# EAGLE board lat_stm_rpi (EAGLE 9.6.2)
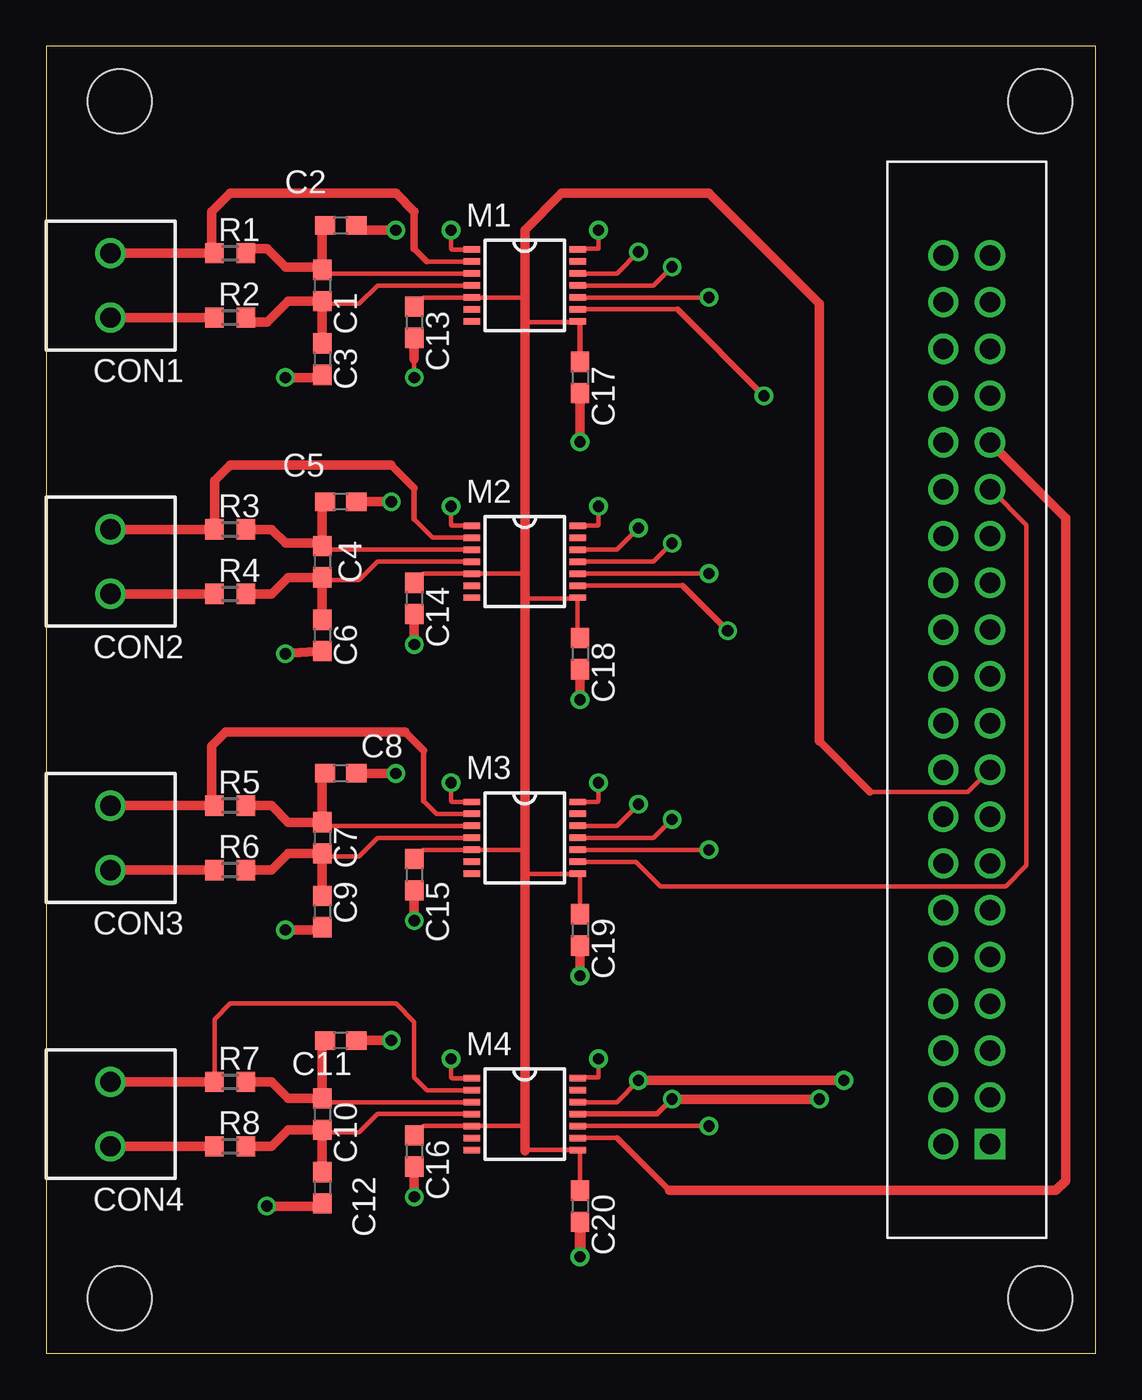
[diagram p0: board, top side]
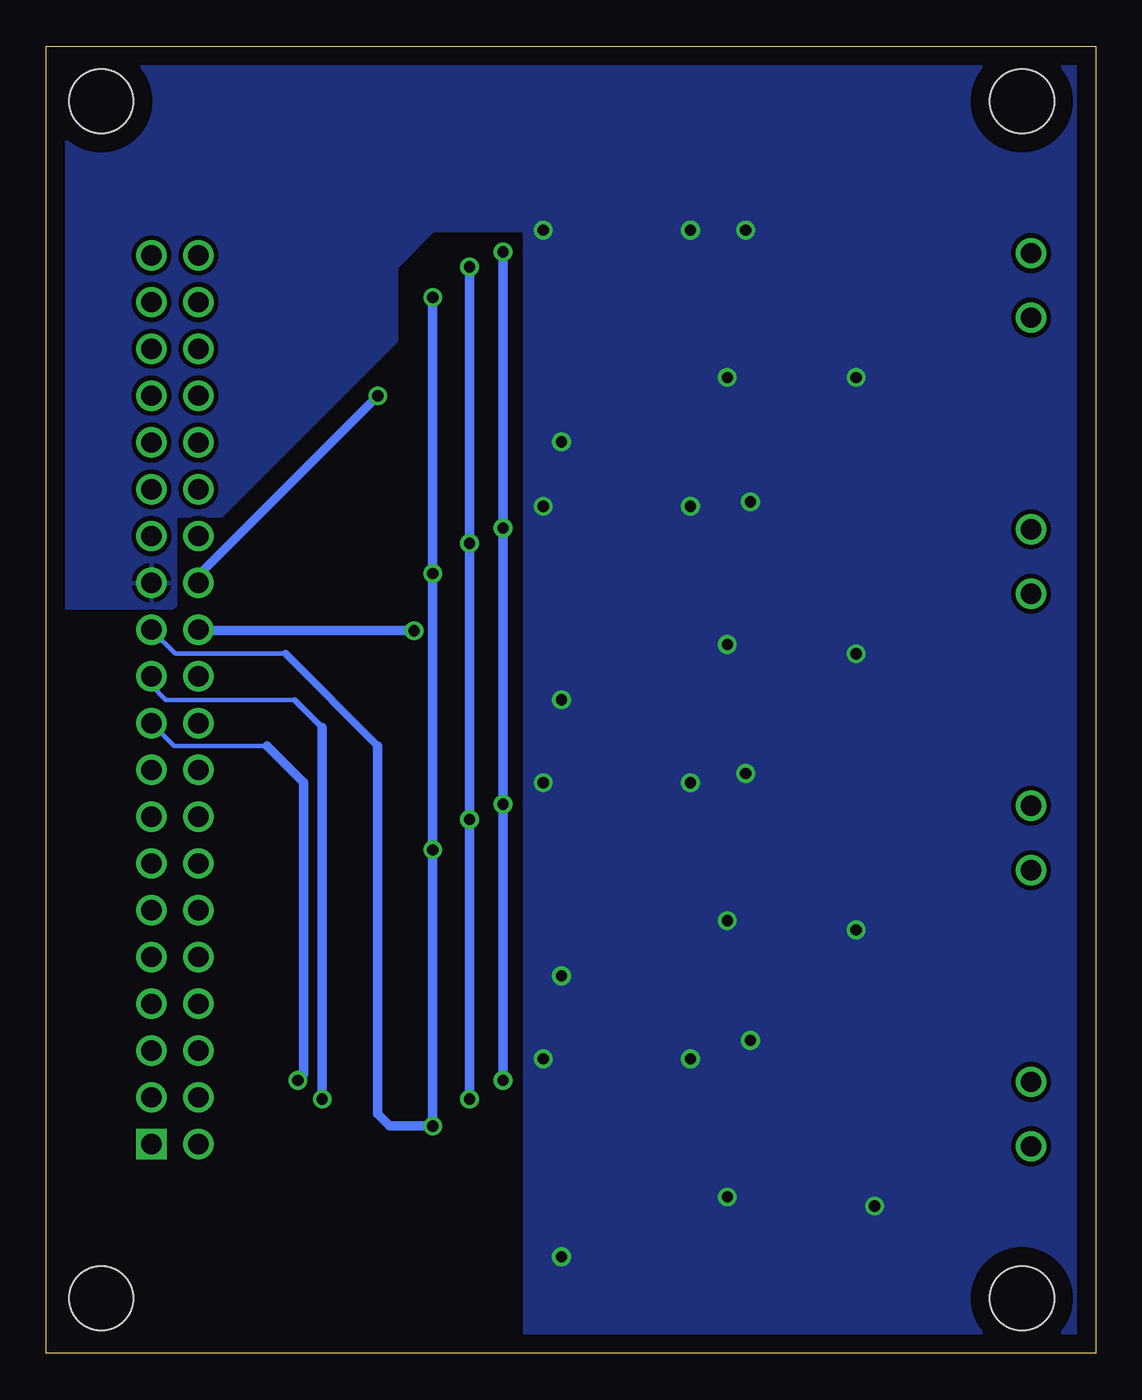
[diagram p1: board, bottom side, seen from below]

Size 57 x 71 mm. Coordinates in mm from the lower left corner, seen from the top.
Outline: 0,0 57,0 57,71 0,71 0,0
Copper layers (1*16): Top 0.035mm / dielectric 1.5mm / Bottom 0.035mm
Design rules "default": minimum track width 6mil, minimum drill 0.35mm, track to track 6mil, track to pad 6mil, pad to pad 6mil, via to via 6mil, smd to smd 6mil, copper to edge 40mil, drill to drill 6mil, minimum pad ring 10mil, minimum via ring 8mil, stop-mask expansion 4mil, vias tented up to drill 0mil, thermal gap 10mil
Net classes: 0 default: width 0.254 mm, drill 0.305 mm, clearance 0.254 mm; 1 spi_bus: width 0.254 mm, drill 0.305 mm, clearance 0.254 mm; 2 spi_cs: width 0.254 mm, drill 0.305 mm, clearance 0.254 mm; 3 tc: width 0.254 mm, drill 0.305 mm, clearance 0.254 mm; 4 3v3: width 0.508 mm, drill 0.61 mm, clearance 0.508 mm; 5 gnd: width 0.762 mm, drill 0.889 mm, clearance 0.254 mm; 6 dev: width 0.254 mm, drill 0.254 mm, clearance 0.254 mm
Holes 3.5 mm at 4,3 54,3 4,68 54,68

## Footprints (pad centres in the part's own frame; a part is rotated, then mirrored left to right if it is on the bottom)
C0603 = smd 1.1 x 1: 1 -0.85,0; 2 0.85,0
893-1332 = drill 1.1: P$1 0,1.75; P$2 0,-1.75
TSSOP14 = smd 0.9 x 0.35: 1 -2.875,1.95; 2 -2.875,1.3; 3 -2.875,0.65; 4 -2.875,0; 5 -2.875,-0.65; 6 -2.875,-1.3; 7 -2.875,-1.95; 8 2.875,-1.95; 9 2.875,-1.3; 10 2.875,-0.65; 11 2.875,0; 12 2.875,0.65; 13 2.875,1.3; 14 2.875,1.95
R0603 = smd 1 x 1.1: 1 -0.85,0; 2 0.85,0
RPI_CON = drill 1.1 square: RPI01 -1.27,24.13 | drill 1.1: RPI02 1.27,24.13; RPI03 -1.27,21.59; RPI04 1.27,21.59; RPI05 -1.27,19.05; RPI06 1.27,19.05; RPI07 -1.27,16.51; RPI08 1.27,16.51; RPI09 -1.27,13.97; RPI10 1.27,13.97; RPI11 -1.27,11.43; RPI12 1.27,11.43; RPI13 -1.27,8.89; RPI14 1.27,8.89; RPI15 -1.27,6.35; RPI16 1.27,6.35; RPI17 -1.27,3.81; RPI18 1.27,3.81; RPI19 -1.27,1.27; RPI20 1.27,1.27; RPI21 -1.27,-1.27; RPI22 1.27,-1.27; RPI23 -1.27,-3.81; RPI24 1.27,-3.81; RPI25 -1.27,-6.35; RPI26 1.27,-6.35; RPI27 -1.27,-8.89; RPI28 1.27,-8.89; RPI29 -1.27,-11.43; RPI30 1.27,-11.43; RPI31 -1.27,-13.97; RPI32 1.27,-13.97; RPI33 -1.27,-16.51; RPI34 1.27,-16.51; RPI35 -1.27,-19.05; RPI36 1.27,-19.05; RPI37 -1.27,-21.59; RPI38 1.27,-21.59; RPI39 -1.27,-24.13; RPI40 1.27,-24.13

## Placement (x,y rotation side)
C1  0.1u  [C0603]  15,58 270 top
C2  0.01u  [C0603]  16,61.25 180 top
C3  0.01u  [C0603]  15,54 270 top
C4  0.1u  [C0603]  15,43 270 top
C5  0.01u  [C0603]  16,46.25 180 top
C6  0.01u  [C0603]  15,39 270 top
C7  0.1u  [C0603]  15,28 270 top
C8  0.01u  [C0603]  16,31.5 180 top
C9  0.01u  [C0603]  15,24 270 top
C10  0.1u  [C0603]  15,13 270 top
C11  0.01u  [C0603]  16,17 180 top
C12  0.01u  [C0603]  15,9 270 top
C13  0.1u  [C0603]  20,56 270 top
C14  0.1u  [C0603]  20,41 270 top
C15  0.1u  [C0603]  20,26 270 top
C16  0.1u  [C0603]  20,11 270 top
C17  0.1u  [C0603]  29,53 270 top
C18  0.1u  [C0603]  29,38 270 top
C19  0.1u  [C0603]  29,23 270 top
C20  0.1u  [C0603]  29,8 270 top
CON1  893-1332  [893-1332]  3.5,58 180 top
CON2  893-1332  [893-1332]  3.5,43 180 top
CON3  893-1332  [893-1332]  3.5,28 180 top
CON4  893-1332  [893-1332]  3.5,13 180 top
M1  MAX31856  [TSSOP14]  26,58 0 top
M2  MAX31856  [TSSOP14]  26,43 0 top
M3  MAX31856  [TSSOP14]  26,28 0 top
M4  MAX31856  [TSSOP14]  26,13 0 top
R1  100  [R0603]  10,59.75 0 top
R2  100  [R0603]  10,56.25 0 top
R3  100  [R0603]  10,44.75 0 top
R4  100  [R0603]  10,41.25 0 top
R5  100  [R0603]  10,29.75 0 top
R6  100  [R0603]  10,26.25 0 top
R7  100  [R0603]  10,14.75 0 top
R8  100  [R0603]  10,11.25 0 top
RPC1  RPI_CON  [RPI_CON]  50,35.5 180 top

## Library data of the parts
C1-C20 = rcl; SPICEPREFIX: C
CON1-CON4 M1-M4 RPC1 = lib_test
R1-R8 = rcl; SPICEPREFIX: R

## Nets
3V3_SPI [dev]: C13.1 C14.1 C15.1 C16.1 C17.1 C18.1 C19.1 C20.1 M1.5 M1.8 M2.5 M2.8 M3.5 M3.8 M4.5 M4.8 RPC1.RPI17
CS0 [dev]: M1.9 RPC1.RPI26
CS1 [dev]: M2.9 RPC1.RPI24
CS2 [dev]: M3.9 RPC1.RPI29
CS3 [dev]: M4.9 RPC1.RPI31
GND_SPI [dev]: C2.1 C3.2 C5.1 C6.2 C8.1 C9.2 C11.1 C12.2 C13.2 C14.2 C15.2 C16.2 C17.2 C18.2 C19.2 C20.2 M1.1 M1.14 M2.1 M2.14 M3.1 M3.14 M4.1 M4.14 RPC1.RPI25
MISO [spi_bus]: M1.11 M2.11 M3.11 M4.11 RPC1.RPI21
MOSI [spi_bus]: M1.12 M2.12 M3.12 M4.12 RPC1.RPI19
SCLK [spi_bus]: M1.10 M2.10 M3.10 M4.10 RPC1.RPI23
T+0 [tc]: C1.2 C3.1 M1.4 R2.2
T+0CON [tc]: CON1.P$1 R2.1
T+1 [tc]: C4.2 C6.1 M2.4 R4.2
T+1CON [tc]: CON2.P$1 R4.1
T+2 [tc]: C7.2 C9.1 M3.4 R6.2
T+2CON [tc]: CON3.P$1 R6.1
T+3 [tc]: C10.2 C12.1 M4.4 R8.2
T+3CON [tc]: CON4.P$1 R8.1
T-0 [tc]: C1.1 C2.2 M1.3 R1.2
T-0CON [tc]: CON1.P$2 M1.2 R1.1
T-1 [tc]: C4.1 C5.2 M2.3 R3.2
T-1CON [tc]: CON2.P$2 M2.2 R3.1
T-2 [tc]: C7.1 C8.2 M3.3 R5.2
T-2CON [tc]: CON3.P$2 M3.2 R5.1
T-3 [tc]: C10.1 C11.2 M4.3 R7.2
T-3CON [tc]: CON4.P$2 M4.2 R7.1

## Tracks (layer width: path | path; a pad name or v marks a point on that pad's centre or on a via)
3V3_SPI
  Top 0.254: 26,57.35 M1.5 20.5,57.35 C13.1 | M1.8 28.82,56 26,56 | 26,42.25 25.9,42.35 M2.5 20.5,42.35 C14.1 | 26,41 28.82,41 M2.8 28.88,38.98 C18.1 | 26,27.25 25.9,27.35 M3.5 20.5,27.35 C15.1 | 26,26 26.05,26.05 M3.8 29,25.93 C19.1 | C20.1 29,10.93 M4.8 26.05,11.05 26,11 | 26,12.25 25.9,12.35 M4.5 20.5,12.35 C16.1 | RPC1.RPI17 50.06,30.48 44.77,30.48 44.75,30.5
  Top 0.305: M1.8 29,55.92 C17.1
  Top 0.406: 42,33.25 44.75,30.5
  Top 0.508: 26,11 26,12.25 26,26 26,27.25 26,41 26,42.25 26,56 26,57.35 26,61 28,63 36,63 42,57 42,33.25
CS0  (via drill 0.61)
  Top 0.254: M1.9 34.28,56.7
  Top 0.305: 34.28,56.7 v38.98,52
  Bottom 0.508: v38.98,52 48.73,42.25 RPC1.RPI26
CS1  (via drill 0.61)
  Top 0.254: M2.9 34.57,41.7
  Top 0.305: 34.57,41.7 v37.02,39.25
  Bottom 0.254: 48.67,39.25 RPC1.RPI24
  Bottom 0.508: v37.02,39.25 48.67,39.25
CS2
  Top 0.254: M3.9 32.05,26.7 33.38,25.38 52.12,25.38 53.25,26.5 53.25,45 51.32,46.93 RPC1.RPI29
CS3
  Top 0.254: M4.9 31,11.7
  Top 0.305: 33.85,8.85 31,11.7
  Top 0.508: RPC1.RPI31 55.37,45.37 55.37,9.37 54.85,8.85 33.85,8.85
GND_SPI  (via drill 0.61)
  Top 0.254: 20,54 v20,53 | M1.1 22.05,59.95 22,60 v22,61 | M1.14 28.93,60 30,60 v30,61 | M2.1 22.05,44.95 22,45 v22,46 | M2.14 29.95,44.95 30,45 v30,46 | M3.1 22.05,29.95 22,30 v22,31 | M3.14 29.95,29.95 30,30 v30,31 | M4.1 22.05,14.95 22,15 v22,16 | M4.14 28.93,15 30,15 v30,16
  Top 0.508: C13.2 20,54 | C17.2 v29,49.5 | C2.1 17.1,61 v19,61 | C3.2 14.85,53 v13,53 | C5.1 v18.75,46.25 | C6.2 v13,38 | C14.2 v20,38.5 | C18.2 v29,35.5 | C19.2 v29,20.5 | C8.1 v19,31.5 | C9.2 14.85,23 v13,23 | C15.2 v20,23.5 | C11.1 v18.75,17 | C12.2 14.85,8 v12,8 | C16.2 v20,8.5
  Top 0.61: C20.2 v29,5.25
  pour Bottom: 0,71 0,0 31,0 31,71
  pour Bottom: 31,71 31,61 36,61 38,59 38,55 47.5,45.5 49.88,45.5 50,45.38 50,40.62 50.12,40.5 57.88,40.5 57.88,71
MISO  (via drill 0.61)
  Top 0.254: M1.11 33,58 v34,59 | M2.11 33,43 v34,44 | M3.11 33,28 v34,29
  Top 0.305: v34,13.81 33.19,13 M4.11
  Top 0.508: v34,13.81 v42,13.81
  Bottom 0.254: 43.5,35.5 50.5,35.5 51.27,36.27 RPC1.RPI21
  Bottom 0.305: 42,34 43.5,35.5
  Bottom 0.508: v42,13.81 42,34 | v34,59 v34,44 v34,29 v34,13.81
MOSI  (via drill 0.61)
  Top 0.254: M1.12 31,58.65 v32.17,59.83 | M2.12 31,43.65 v32.17,44.83 | M3.12 31,28.65 v32.17,29.82 | M4.12 31,13.65 v32.17,14.82
  Top 0.508: v32.17,14.82 v43.33,14.82
  Bottom 0.254: RPC1.RPI19 50.04,33 45,33
  Bottom 0.508: v32.17,59.83 v32.17,44.83 v32.17,29.82 v32.17,14.82 | 45,33 43,31 43,15.15 v43.33,14.82
SCLK  (via drill 0.61)
  Top 0.254: M1.10 v36,57.35 | M2.10 v36,42.35 | M3.10 v36,27.35 | M4.10 v36,12.35
  Bottom 0.254: 51.27,39.27 50,38 44,38
  Bottom 0.406: 39,33 44,38
  Bottom 0.508: 39,33 39,13 38.35,12.35 v36,12.35 v36,27.35 v36,42.35 v36,57.35 | 51.27,39.27 RPC1.RPI23
T+0
  Top 0.254: M1.4 18,58 17,57 15.15,57 | 15.15,57 C1.2 | 11.1,56 R2.2 | 15,56.85 15.15,57
  Top 0.508: C1.2 13.15,57.15 12,56 11.1,56 | C3.1 15,56.85
T+0CON
  Top 0.508: CON1.P$1 R2.1
T+1
  Top 0.254: M2.4 18,43 17,42 15.15,42 C4.2
  Top 0.508: R4.2 12.25,41.25 13.15,42.15 C4.2 C6.1
T+1CON
  Top 0.508: R4.1 CON2.P$1
T+2
  Top 0.254: M3.4 18,28 17,27 15.15,27 C7.2
  Top 0.508: R6.2 12.25,26.25 13.15,27.15 C7.2 C9.1
T+2CON
  Top 0.508: R6.1 CON3.P$1
T+3
  Top 0.254: M4.4 18,13 17,12 15.15,12 C10.2
  Top 0.508: C12.1 C10.2 13.15,12.15 12.25,11.25 R8.2
T+3CON
  Top 0.508: R8.1 CON4.P$1
T-0
  Top 0.254: M1.3 15.2,58.65 C1.1 14.85,59 | 15,61.1 C2.2 | 11.1,60 R1.2
  Top 0.508: C1.1 15,61.1 | 14.85,59 13,59 12,60 11.1,60
T-0CON
  Top 0.254: M1.2 20.7,59.3 | 9,59.9 R1.1
  Top 0.305: 20.7,59.3 20,60
  Top 0.406: 20,60 20,62
  Top 0.508: 20,62 19,63 10,63 9,62 9,59.9 | CON1.P$2 R1.1
T-1
  Top 0.254: M2.3 15.2,43.65 C4.1
  Top 0.508: C5.2 15,46.1 C4.1 14.85,44 13,44 12.25,44.75 R3.2
T-1CON
  Top 0.254: M2.2 21,44.3 20,45.3
  Top 0.305: 20,45.3 20,47
  Top 0.406: 20,47 18.75,48.25
  Top 0.508: CON2.P$2 R3.1 9.15,47.4 10,48.25 18.75,48.25
T-2
  Top 0.254: M3.3 15.2,28.65 C7.1
  Top 0.508: R5.2 12.25,29.75 13.15,28.85 C7.1 15,31.35 C8.2
T-2CON
  Top 0.254: M3.2 21.2,29.3 20.5,30 | 9,29.9 R5.1
  Top 0.305: 20.5,30 20.5,32.75
  Top 0.406: 20.5,32.75 19.5,33.75
  Top 0.508: R5.1 CON3.P$2 | 19.5,33.75 9.75,33.75 9,33 9,29.9
T-3
  Top 0.254: M4.3 15.2,13.65 C10.1
  Top 0.508: C11.2 15,16.85 C10.1 13.15,13.85 12.25,14.75 R7.2
T-3CON
  Top 0.254: M4.2 20.7,14.3 20,15 20,18 19,19 10,19 9.15,18.15 R7.1
  Top 0.508: R7.1 CON4.P$2